# EAGLE board Qwiic RFID - ID12LA (EAGLE 9.0.1)
REVISION: A
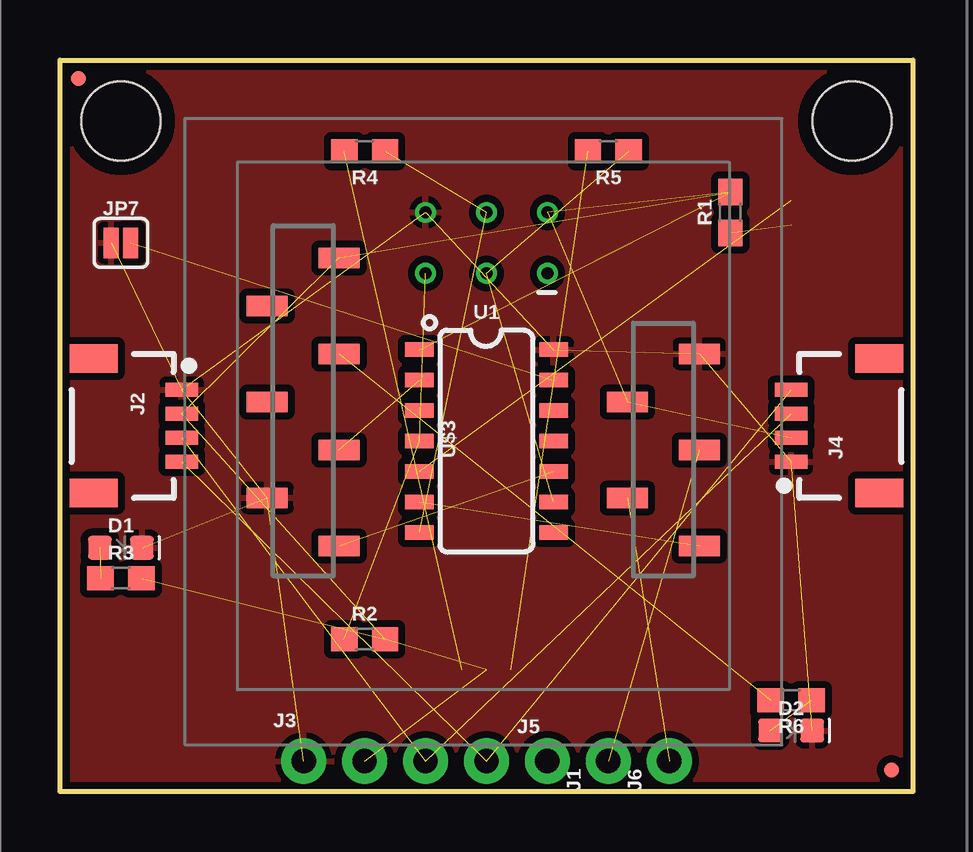
[diagram p0: board, top side]
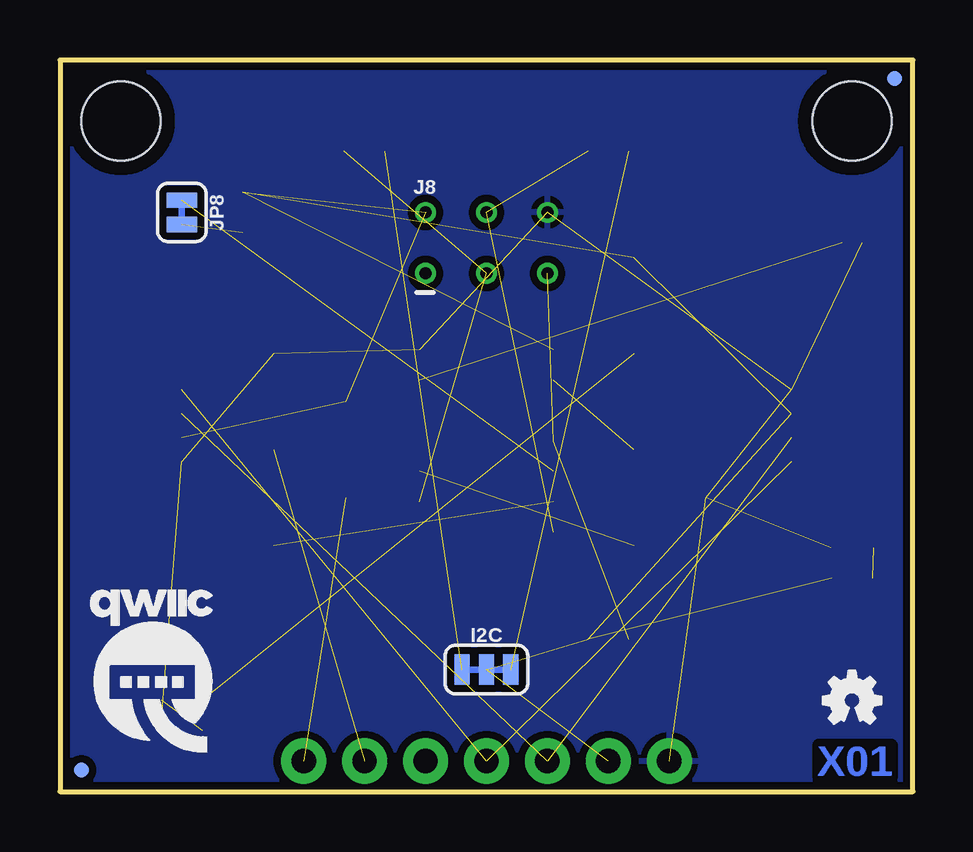
[diagram p1: board, bottom side, seen from below]

Size 35.56 x 30.48 mm. Coordinates in mm from the lower left corner, seen from the top.
Outline: 0,0 0,30.48 35.56,30.48 35.56,0 0,0
Copper layers (1*16): Top 0.035mm / dielectric 1.5mm / Bottom 0.035mm
Design rules "SparkFun-2-layer-PCBWay-LIMIT": minimum track width 6mil, minimum drill 0.3mm, track to track 6mil, track to pad 6mil, pad to pad 6mil, via to via 6mil, smd to smd 6mil, copper to edge 6mil, drill to drill 6mil, minimum pad ring 7mil, minimum via ring 7mil, stop-mask expansion 4mil, vias tented up to drill 25mil, thermal gap 10mil
Net classes: 1 power: width 0.203 mm

## Footprints (pad centres in the part's own frame; a part is rotated, then mirrored left to right if it is on the bottom)
LED-0603 = smd 1 x 1: A -0.877,0; C 0.877,0
SMT-JUMPER_3_2-NC_TRACE_SILK = smd 0.635 x 1.27: 1 -1.016,0; 2 0,0; 3 1.016,0
1X01_NO_SILK = drill 1.016 pad 1.88: 1 0,0
1X04_1MM_RA = smd 0.6 x 1.35: 1 -1.5,0; 2 -0.5,0; 3 0.5,0; 4 1.5,0 | smd 1.2 x 2: NC1 2.8,-3.675; NC2 -2.8,-3.675
1X04_NO_SILK = drill 1.016 pad 1.88: 1 0,0; 2 2.54,0; 3 5.08,0; 4 7.62,0
2X3_TEST_POINTS = drill 0.508: 1 -2.54,-1.27; 2 -2.54,1.27; 3 0,-1.27; 4 0,1.27; 5 2.54,-1.27; 6 2.54,1.27
MICRO-FIDUCIAL = smd 0.635 x 0.635: 1 0,0
STAND-OFF = hole 3.302: 0,0
SMT-JUMPER_2_NO_SILK = smd 0.635 x 1.27: 1 -0.406,0; 2 0.406,0
SMT-JUMPER_2_NC_TRACE_SILK = smd 0.635 x 1.27: 1 -0.508,0; 2 0.508,0
0603 = smd 1.1 x 1: 1 -0.85,0; 2 0.85,0
SO14 = smd 0.6 x 1.2: 1 -3.175,-2.8; 2 -1.905,-2.8; 3 -0.635,-2.8; 4 0.635,-2.8; 5 1.905,-2.8; 6 3.175,-2.8; 7 4.445,-2.8; 8 4.445,2.8; 9 3.175,2.8; 10 1.905,2.8; 11 0.635,2.8; 12 -0.635,2.8; 13 -1.905,2.8; 14 -3.175,2.8
ID-12_SMD = smd 0.85 x 1.7: 1 2.993,-8.998; 2 0.993,-5.998; 3 -1.007,-8.998; 4 -3.007,-5.998; 5 -5.007,-8.998; 6 -5.007,6.013; 7 -3.007,9.013; 8 -1.007,6.013; 9 0.993,9.013; 10 2.993,6.013; 11 6.993,6.013; NC 4.993,9.013

## Placement (x,y rotation side)
D1  RED  [LED-0603]  2.54,10.16 0 top
D2  BLUE  [LED-0603]  30.48,2.54 0 top
FRAME1  FRAME-LETTER  [CREATIVE_COMMONS]  -10.16,-10.16 0 top  (outside the outline)
I2C  [SMT-JUMPER_3_2-NC_TRACE_SILK]  17.78,5.08 0 bottom
J1  [1X01_NO_SILK]  22.86,1.27 90 top
J2  SMD  [1X04_1MM_RA]  5.08,15.24 270 top
J3  PTH  [1X04_NO_SILK]  10.16,1.27 0 top
J4  SMD  [1X04_1MM_RA]  30.48,15.24 90 top
J5  [1X01_NO_SILK]  20.32,1.27 0 top
J6  [1X01_NO_SILK]  25.4,1.27 90 top
J8  AVR_SPI_PROG_3X2TESTPOINTS  [2X3_TEST_POINTS]  17.78,22.86 0 bottom
JP1  FIDUCIALUFIDUCIAL  [MICRO-FIDUCIAL]  0.76,29.72 0 bottom
JP2  FIDUCIALUFIDUCIAL  [MICRO-FIDUCIAL]  34.67,0.89 0 top
JP3  STAND-OFF  [STAND-OFF]  2.54,27.94 0 top
JP4  STAND-OFF  [STAND-OFF]  33.02,27.94 0 top
JP5  FIDUCIALUFIDUCIAL  [MICRO-FIDUCIAL]  34.67,0.89 0 bottom
JP6  FIDUCIALUFIDUCIAL  [MICRO-FIDUCIAL]  0.76,29.72 0 top
JP7  ADR  [SMT-JUMPER_2_NO_SILK]  2.54,22.86 0 top
JP8  INT  [SMT-JUMPER_2_NC_TRACE_SILK]  30.48,24.13 270 bottom
LOGO1  OSHW-LOGOMINI  [OSHW-LOGO-MINI]  2.54,3.81 0 bottom
R1  10k  [0603]  27.94,24.13 90 top
R2  4.7k  [0603]  12.7,6.35 0 top
R3  1k  [0603]  2.54,8.89 0 top
R4  2.2k  [0603]  12.7,26.67 180 top
R5  2.2k  [0603]  22.86,26.67 180 top
R6  1k  [0603]  30.48,3.81 180 top
U1  ATTINY84  [SO14]  17.78,15.24 270 top
U$3  ID-12/20SMD  [ID-12_SMD]  17.65,15.24 90 top
U$8  [QWIIC-LOGO-MEDIUM]  31.75,5.08 0 bottom

## Library data of the parts
D1 = SparkFun-LED; PROD_ID: DIO-00819
D2 = SparkFun-LED; PROD_ID: DIO-08575
FRAME1 LOGO1 = SparkFun-Aesthetics
I2C JP7 JP8 = SparkFun-Jumpers
J1 J5 J6 J8 = SparkFun-Connectors
J2-J4 = SparkX
JP1-JP6 = SparkFun
R1 = SparkFun-Resistors; PROD_ID: RES-00824
R2 = SparkFun-Resistors; PROD_ID: RES-07857
R3 R6 = SparkFun-Resistors; PROD_ID: RES-07856
R4 R5 = SparkFun-Resistors; PROD_ID: RES-08272
U1 = SparkFun-IC-Microcontroller; PROD_ID: IC-11285
U$3 = SparkFun-RF; PROD_ID: CONN-09345, CONN-09344
U$8 = Labels

## Nets
3.3V: I2C.2 J2.2 J3.2 J4.2 J8.2 R1.2 R2.2 R3.2 U1.1 U$3.2 U$3.11
!INT: J5.1
!RST: J8.5 R2.1 U1.4
ANT1: J1.1 U$3.3
ANT2: J6.1 U$3.4
CP: U1.6 U$3.5
D0: U$3.9
D1: U1.2 U$3.8
DO: U1.3
GND: D1.C D2.C J2.1 J3.1 J4.1 J8.6 JP7.1 U1.14 U$3.1 U$3.7
MISO: J8.1
N$1: I2C.1 R5.2
N$2: I2C.3 R4.2
N$3: D1.A R3.1
N$4: JP8.2 R1.1
N$6: JP7.2 U1.13
N$7: JP8.1 U1.5
N$11: D2.A R6.1
RFID_LED: R6.2 U$3.10
SCL: J2.4 J3.4 J4.4
SCL/SCK: J8.3 R5.1 U1.9
SDA: J2.3 J3.3 J4.3
SDA/MOSI: J8.4 R4.1 U1.7
TAG_IN_RANGE: U1.10 U$3.6

## Tracks (layer width: path | path; a pad name or v marks a point on that pad's centre or on a via)
3.3V  (10 unrouted)
!RST  (2 unrouted)
ANT1  (1 unrouted)
ANT2  (1 unrouted)
CP  (1 unrouted)
D1  (1 unrouted)
GND  (9 unrouted)
  pour Bottom (isolate 0.305): 0,0 0,30.48 35.56,30.48 35.56,0
  pour Top (isolate 0.305): 0,0 0,30.48 35.56,30.48 35.56,0
N$1  (1 unrouted)
N$2  (1 unrouted)
N$3  (1 unrouted)
N$4  (1 unrouted)
N$6  (1 unrouted)
N$7  (1 unrouted)
N$11  (1 unrouted)
RFID_LED  (1 unrouted)
SCL  (2 unrouted)
SCL/SCK  (2 unrouted)
SDA  (2 unrouted)
SDA/MOSI  (2 unrouted)
TAG_IN_RANGE  (1 unrouted)

## Text on the board
Bottom: X01
Measures: Units in Inches
tDocu: Elias Santistevan